# Altium PCB Beambreak Array S - Receiver.PcbDoc
Units mm, origin at the board's own origin, x right, y up, seen from the top; angles counter-clockwise.
Board outline 12 x 64 mm, 2 copper layers (Top Layer, Bottom Layer), stack 1.57 mm thick; 38 components, 22 nets, 94 pads, 32 vias.
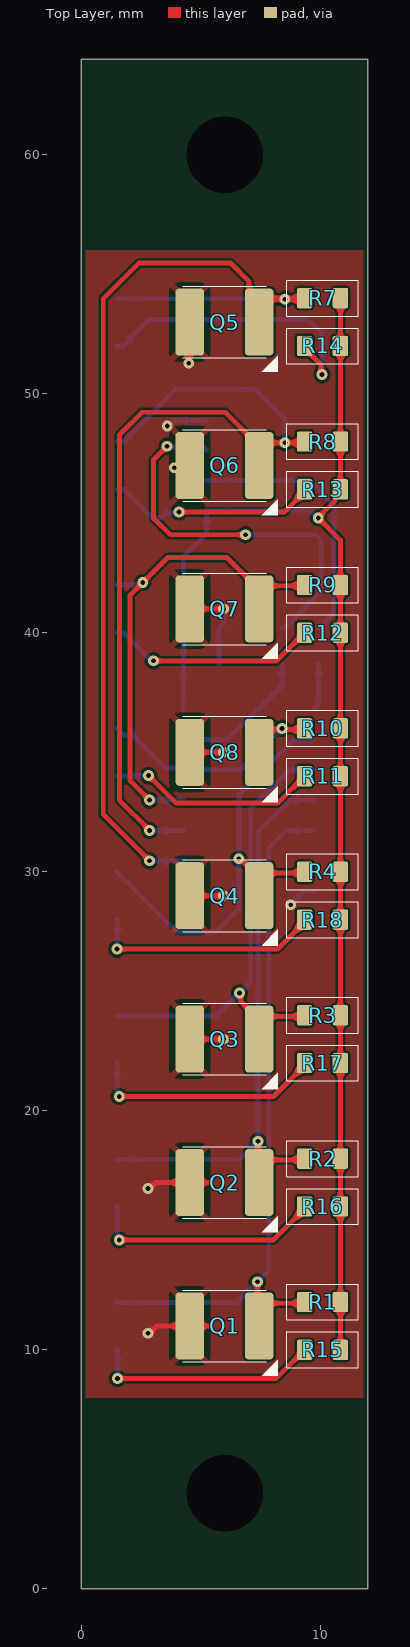
[diagram p0: Top Layer view]
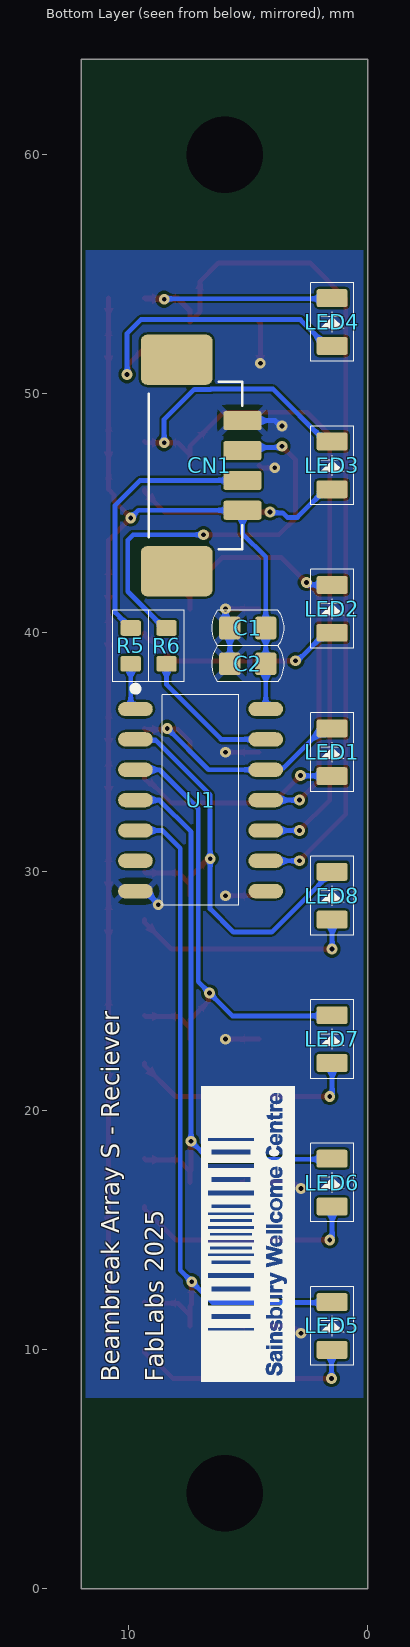
[diagram p1: Bottom Layer view, seen from below]
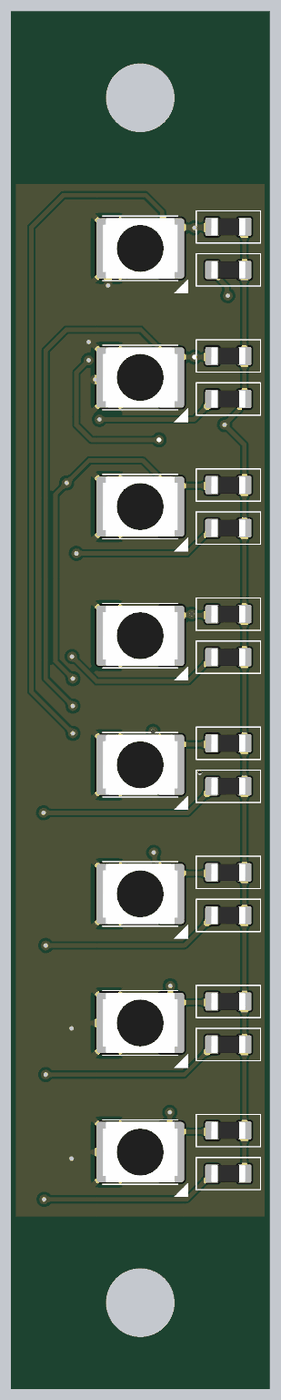
[diagram p2: 3D render of the assembled board from above, using the file's embedded part models]
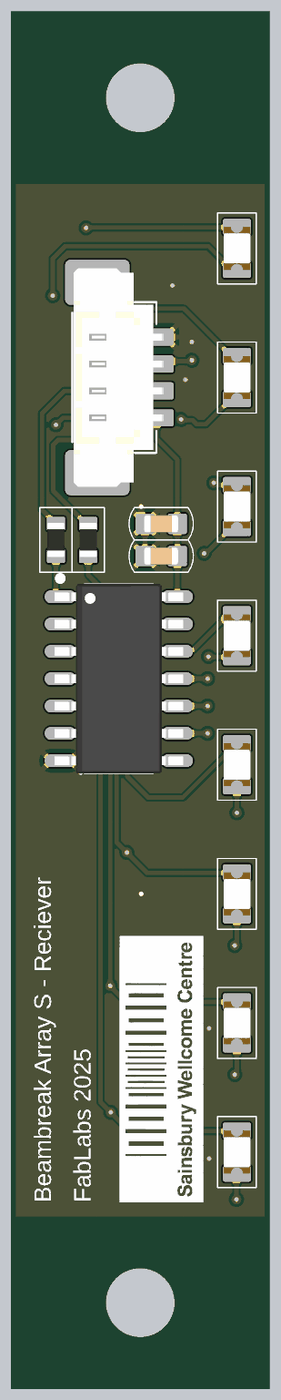
[diagram p3: 3D render of the assembled board from below, using the file's embedded part models]

## Layer stack, top to bottom
Top Solder: solder mask 0.0127, Solder Resist, Dk 3.8
Top Layer: signal copper 0.035
Dielectric: core 1.5, FR-4, Dk 4.5
Bottom Layer: signal copper 0.035
Bottom Solder: solder mask 0.0127, Solder Resist, Dk 3.8

## Board outline
0,0 12,0 12,64 0,64

## Design rules (kind name [scope] priority, off if disabled: settings)
BoardOutlineClearance [(OnLayer('Bottom Overlay') OR OnLayer('Top Overlay'))] p1: gap=0 ignorepadtopadclearanceinfootprint=FALSE
BoardOutlineClearance BoardOutlineClearance_1 [All] p2: gap=0.2 ignorepadtopadclearanceinfootprint=FALSE
Clearance [All] p1: gap=0.089 ignorepadtopadclearanceinfootprint=FALSE except(0.127: Arc-Via Track-Via SMDPad-Via THPad-Via Via-Via Via-Fill Via-Poly Via-Region Via-Text; 0.203: Arc-Hole Track-Hole Via-Hole Fill-Hole Poly-Hole Region-Hole Text-Hole)
ComponentClearance [All] p1: gap=0.089 collisioncheckmode=3 verticalgap=0.089 showdistances=TRUE
DiffPairsRouting JLCPCB_6L_90Ohm [InDifferentialPairClass('USB')] p1: maxlimit=0.127 minlimit=0.127 mostfreqgap=0.127 toplayer_minwidth=0.172 toplayer_maxwidth=0.172 toplayer_prefwidth=0.172 bottomlayer_minwidth=0.172 bottomlayer_maxwidth=0.172 bottomlayer_prefwidth=0.172 maxuncoupledlength=12.7
DiffPairsRouting JLCPCB_6L_120Ohm [InDifferentialPairClass('RS485')] p2: maxlimit=0.305 minlimit=0.127 mostfreqgap=0.305 toplayer_minwidth=0.16 toplayer_maxwidth=0.16 toplayer_prefwidth=0.16 bottomlayer_minwidth=0.16 bottomlayer_maxwidth=0.16 bottomlayer_prefwidth=0.16 maxuncoupledlength=12.7
Height [All] p1: minheight=0 maxheight=1816.048 prefheight=12.7
HoleSize [All] p1: absolutevalues=TRUE maxlimit=6.3 minlimit=0.2 maxpercent=80.000 minpercent=20.000
HoleToHoleClearance [All] p1: gap=0.25 allowstackedmicrovias=FALSE
MinimumAnnularRing [All] p1: minimumring=0.076
MinimumSolderMaskSliver [All] p1: minsoldermaskwidth=0
PlaneClearance [All] p1: clearance=0.089
PlaneConnect PlaneConnectPowerPads [InPadClass('PowerPads')] p1: planeconnectstyle=Direct reliefexpansion=0.508 reliefentries=4 reliefconductorwidth=0.254 reliefairgap=0.254
PlaneConnect [All] p2: pad.planeconnectstyle=Relief pad.reliefexpansion=0.3 pad.reliefentries=4 pad.reliefconductorwidth=0.089 pad.reliefairgap=0.089 via.planeconnectstyle=Direct via.reliefexpansion=0.3 via.reliefentries=4 via.reliefconductorwidth=0.127 via.reliefairgap=0.127
PolygonConnect PolygonConnectPowerPads [(InNet('GND') OR InNet('3V3') OR InNet('3V3A'))] p1: thpad.connectstyle=Relief thpad.reliefconductorwidth=0.254 thpad.reliefentries=4 thpad.polygonreliefangle="45 Angle" thpad.airgapwidth=0.254 smdpad.connectstyle=Relief smdpad.reliefconductorwidth=0.254 smdpad.reliefentries=4 smdpad.polygonreliefangle="45 Angle" smdpad.airgapwidth=0.254 via.connectstyle=Direct via.reliefconductorwidth=0.254 via.reliefentries=4 via.polygonreliefangle="45 Angle" via.airgapwidth=0.254
PolygonConnect [All] p2: connectstyle=Direct reliefconductorwidth=0.089 reliefentries=4 polygonreliefangle="90 Angle" airgapwidth=0.089
RoutingVias [All] p1: holewidth=0.2 width=0.45 viastyle="Through Hole" minholewidth=0.2 minwidth=0.45 maxholewidth=6.3 maxwidth=6.55
SilkToSilkClearance [All] p1: silktosilkclearance=0
SilkToSolderMaskClearance [IsPad] p1 off: minsilkscreentomaskgap=0.089 clearancetoexposedcopper=TRUE
SolderMaskExpansion [All] p1: expansion=0.075 istentingtop=FALSE
SupplyNets "Schematic Supply Nets_1" [InNet('VCC')] p1: voltage=0.000
SupplyNets "Schematic Supply Nets_4" [InNet('GND')] p2: voltage=0.000
Width [All] p1: maxlimit=1816.048 minlimit=0.089 preferedwidth=0.089
20 further rules are at their usual default settings.

## Components (designator, comment, footprint, x,y, rotation, side; value= is the part's Value field where it differs from the comment)
C1 "C0603-1uF-50V" CAP_CHIP_0603 5.025,40.2 r0 bottom value=1µF
C2 "C0603-100nF-50V" CAP_CHIP_0603 5.025,38.7 r180 bottom value=100nF
CN1 "IO" MOLEX_1.25_4P 7,47 r270 bottom
LED1 "DBG" LED_CHIP_0805 1.5,35 r270 bottom
LED2 "DBG" LED_CHIP_0805 1.5,41 r270 bottom
LED3 "DBG" LED_CHIP_0805 1.5,47 r270 bottom
LED4 "DBG" LED_CHIP_0805 1.5,53 r270 bottom
LED5 "DBG" LED_CHIP_0805 1.5,11 r270 bottom
LED6 "DBG" LED_CHIP_0805 1.5,17 r270 bottom
LED7 "DBG" LED_CHIP_0805 1.5,23 r270 bottom
LED8 "DBG" LED_CHIP_0805 1.5,29 r270 bottom
Q1 "VEMT3700F" PT_3528_NPN 6,11 r180 top
Q2 "VEMT3700F" PT_3528_NPN 6,17 r180 top
Q3 "VEMT3700F" PT_3528_NPN 6,23 r180 top
Q4 "VEMT3700F" PT_3528_NPN 6,29 r180 top
Q5 "VEMT3700F" PT_3528_NPN 6,53 r180 top
Q6 "VEMT3700F" PT_3528_NPN 6,47 r180 top
Q7 "VEMT3700F" PT_3528_NPN 6,41 r180 top
Q8 "VEMT3700F" PT_3528_NPN 6,35 r180 top
R1 "R0603-47K" RES_CHIP_0603 10.1,12 r0 top value=47k
R2 "R0603-47K" RES_CHIP_0603 10.1,18 r0 top value=47k
R3 "R0603-47K" RES_CHIP_0603 10.1,24 r0 top value=47k
R4 "R0603-47K" RES_CHIP_0603 10.1,30 r0 top value=47k
R5 "R0603-1K" RES_CHIP_0603 9.925,39.45 r270 bottom value=1k
R6 "R0603-0R" RES_CHIP_0603 8.425,39.45 r90 bottom value=0
R7 "R0603-47K" RES_CHIP_0603 10.1,54 r0 top value=47k
R8 "R0603-47K" RES_CHIP_0603 10.1,48 r0 top value=47k
R9 "R0603-47K" RES_CHIP_0603 10.1,42 r0 top value=47k
R10 "R0603-47K" RES_CHIP_0603 10.1,36 r0 top value=47k
R11 "R0603-10K" RES_CHIP_0603 10.1,34 r0 top value=10k
R12 "R0603-10K" RES_CHIP_0603 10.1,40 r0 top value=10k
R13 "R0603-10K" RES_CHIP_0603 10.1,46 r0 top value=10k
R14 "R0603-10K" RES_CHIP_0603 10.1,52 r0 top value=10k
R15 "R0603-10K" RES_CHIP_0603 10.1,10 r0 top value=10k
R16 "R0603-10K" RES_CHIP_0603 10.1,16 r0 top value=10k
R17 "R0603-10K" RES_CHIP_0603 10.1,22 r0 top value=10k
R18 "R0603-10K" RES_CHIP_0603 10.1,28 r0 top value=10k
U1 "CD4078B" SOIC14 7,33 r270 bottom

## Footprints (in the part's own frame and the unit in brackets; to place one, negate y for a bottom-side part, rotate by r counter-clockwise, add the part's x,y. Pads: shape width x height; smd on the part's side, far side on the other; paste and mask are expansions set on the pad)
CAP_CHIP_0603 [mm]
  rrect25% 0.9x0.95 smd: 1(-0.75,0) 2(0.75,0)
  silkscreen extent -1.5,-0.75 1.5,0.75, body extent -0.8,-0.4 0.8,0.4, height 0.8
LED_CHIP_0805 [mm]
  rrect25% 0.75x1.3 smd: 1(-1,0) 2(1,0)
  silkscreen extent -1.65,-0.9 1.65,0.9, body extent -1,-0.62 1,0.63, height 1
MOLEX_1.25_4P [mm]
  rrect25% 0.8x1.6 smd: 1(-1.875,1.75) 2(-0.625,1.75) 3(0.625,1.75) 4(1.875,1.75)
  rrect25% 2.1x3 smd: S1(-4.425,-1) S2(4.425,-1)
  silkscreen extent -3.5,-2.16 3.5,1.75, body extent -5.07,-2.1 5.07,2.1, height 4.7
PT_3528_NPN [mm] "3528 NPN Phototransistor"
  rrect25% 1.2x2.8 smd: 1(-1.45,0) 2(1.45,0)
  silkscreen extent -2.24,-1.5 1.75,2.09, body extent -1.75,-1.4 1.75,1.4, height 1.85
RES_CHIP_0603 [mm]
  rrect25% 0.65x0.85 smd: 1(-0.75,0) 2(0.75,0)
  silkscreen extent -1.5,-0.75 1.5,0.75, body extent -0.8,-0.4 0.8,0.4, height 0.45
SOIC14 [mm] "SOIC, 14-Leads, Body 8.65x3.90mm, Pitch 1.27mm, IPC Medium Density"
  oval 0.6x1.45 smd: 1(-3.81,-2.725) 2(-2.54,-2.725) 3(-1.27,-2.725) 4(0,-2.725) 5(1.27,-2.725) 6(2.54,-2.725) 7(3.81,-2.725) 8(3.81,2.725) 9(2.54,2.725) 10(1.27,2.725) 11(0,2.725) 12(-1.27,2.725) 13(-2.54,2.725) 14(-3.81,2.725)
  silkscreen extent -4.78,-2.85 4.4,1.6, body extent -4.4,-3 4.4,3, height 1.75

## Part data
C1: library part CMP-611-0033-11, "0603 Multilayer Ceramic Capacitors MLCC", Capacitor Type=Ceramic, Case/Package=0603, Dielectric=X5R, LCSC Part N.=C15849, PartNumber=CL10A105KB8NNNC, Tolerance=10%, Voltage Rating=50V, Mount=SMD, Pick&PlaceFootprint=C0603, RoHS=Yes
C2: library part CMP-611-0027-24, "0603 Multilayer Ceramic Capacitors MLCC", Capacitor Type=Ceramic, Case/Package=0603, Dielectric=X7R, LCSC Part N.=C14663, PartNumber=CC0603KRX7R9BB104, Tolerance=10%, Voltage Rating=50V, Mount=SMD, Pick&PlaceFootprint=C0603, RoHS=Yes
CN1: library part CMP-370-0030-7, "Conn Shrouded Header (3 Sides) HDR 4 POS 1.25mm Solder ST Top Entry SMD PicoBlade™ T/R", Current Rating=1A, LCSC Part N.=C17617036, PartNumber=53398-0471, Gender=Male, Mounting Technology="Surface Mount", Number of Positions=4, Number of Rows=1, Orientation=Vertical, Pitch=1.25mm
LED1 LED2 LED3 LED4 LED5 LED6 LED7 LED8: library part CMP-520-0019-2, "Red 0805 Light Emitting Diodes (LED) ROHS", Colour=Red, Forward Current=25mA, Forward Voltage=2.1V, LCSC Part N.=C84256, PartNumber=NCD0805R1, Mount="Surface Mount", Pick&PlaceFootprint=LED0805, Wavelength=620nm
Q1 Q2 Q3 Q4 Q5 Q6 Q7 Q8: library part CMP-540-0001-1, "No Phototransistor IR Chip Silicon 940nm 2-Pin PLCC T/R", Dark Current=200nA, LCSC Part N.=C5334342, Max Collector Current=50mA, PartNumber=VEMT3700F-GS08, Orientation="Top View", Polarity=NPN, Rise Time=6000ns, Wavelength=940nm
R1 R2 R3 R4 R7 R8 R9 R10: library part CMP-633-0052-25, "100mW Thick Film Resistors 75V ±100ppm/℃ ±1% 0603 Chip Resistor", Case/Package=0603, LCSC Part N.=C25819, Number of Resistors=1, PartNumber=0603WAF4702T5E, Power Rating=100mW, Tolerance=1%, Voltage Rating=75V, Mount="Surface Mount", Pick&PlaceFootprint=R0603
R5: library part CMP-633-0013-26, "100mW Thick Film Resistors 75V ±100ppm/℃ ±1% 0603 Chip Resistor", Case/Package=0603, LCSC Part N.=C21190, Number of Resistors=1, PartNumber=0603WAF1001T5E, Power Rating=100mW, Tolerance=1%, Voltage Rating=75V, Mount="Surface Mount", Pick&PlaceFootprint=R0603
R6: library part CMP-633-0049-25, "100mW Thick Film Resistors 75V ±100ppm/℃ ±1% 0603 Chip Resistor", Case/Package=0603, LCSC Part N.=DNP, Number of Resistors=1, PartNumber=0603WAF0000T5E, Power Rating=100mW, Tolerance=1%, Voltage Rating=75V, Mount="Surface Mount", Pick&PlaceFootprint=R0603
R11 R12 R13 R14 R15 R16 R17 R18: library part CMP-633-0002-26, "100mW Thick Film Resistors 75V ±100ppm/℃ ±1% 0603 Chip Resistor", Case/Package=0603, LCSC Part N.=C25804, Number of Resistors=1, PartNumber=0603WAF1002T5E, Power Rating=100mW, Tolerance=1%, Voltage Rating=75V, Mount="Surface Mount", Pick&PlaceFootprint=R0603
U1: library part CMP-950-0028-2, "IC GATE NOR/OR 8INPUT 14SOIC NOR/OR Gate Configurable 1 Circuit 8 Input 14-SOIC", LCSC Part N.=C84464, Max Supply Voltage=18V, Min Supply Voltage=3V, PartNumber=CD4078BM96, Channels=8, Logic Function="NOR, OR", Number of Bits=1, Number Of Circuits=1, Pick&PlaceFootprint=SOIC14, Propagation Delay=110ns

## Free pads (board coordinates)
  round 0 hole 3.2 unplated: 1(6,4) 1(6,60)

## Via types
v1: diameter 0.45, hole 0.2, Top Layer to Bottom Layer, tented both sides, 32 vias

## Nets (pads, with @x,y where several pads share a name; then routed paths per layer and width w, separated by ;. In a path a pad name is that pad's centre, name@x,y a point inside that pad or via, vN(x,y) a via of type N, cw(c..) or ccw(c..) an arc to the next point about the centre after c; other vN are vias at no path point)
GND: C1.2 C2.1 CN1.1 Q1.2 Q2.2 Q3.2 Q4.2 Q5.2 Q6.2 Q7.2 Q8.2 U1.7 | length 17.2
  Top Layer w0.203: v1(2.8,10.7) 2.867,10.7 3.167,11 Q1.2 ; v1(2.8,16.75) 2.867,16.75 3.117,17 Q2.2 ; v1(3.9,46.9) 4.45,46.9 Q6.2 ; v1(4.5,51.275) 4.5,52.95 Q5.2 ; Q3.2 v1(5.96,23) v1@5.975,23.015 ; Q4.2 v1(5.96,29) v1@5.975,29.015 ; Q8.2 v1(5.96,35) v1@5.975,35.015 ; Q7.2 v1(5.96,41) v1@5.975,41.015
  Bottom Layer w0.203: v1(3.6,48.65) 3.667,48.65 3.892,48.875 CN1.1 ; C2.1 C1.2 5.96,40.385 v1(5.96,41) ; v1(8.774,28.622) 8.774,28.643 9.321,29.19 U1.7
INA: LED8.1 Q4.1 R4.1 U1.2 | length 19.5
  Top Layer w0.203: v1(6.6,30.55) 6.647,30.503 6.721,30.503 7.45,29.774 Q4.1@7.45,29.475 ; Q4.1 Q4.1@7.45,29.475 ; R4.1 9.3,29.95 7.925,29.95 Q4.1@7.45,29.475
  Bottom Layer w0.203: LED8.1 4.025,27.475 5.625,27.475 6.6,28.45 v1(6.6,30.55) 6.6,33.225 8.883,35.508 9.693,35.508 U1.2
INB: LED7.1 Q3.1 R3.1 U1.3 | length 21.1
  Top Layer w0.203: v1(6.625,24.925) 6.672,24.878 6.672,24.578 7.45,23.8 Q3.1@7.45,23.475 ; Q3.1 Q3.1@7.45,23.475 ; R3.1 9.3,23.95 7.925,23.95 Q3.1@7.45,23.475
  Bottom Layer w0.203: LED7.1@1.525,23.975 5.675,23.975 v1(6.625,24.925) 7.1,25.4 7.1,32.65 8.72,34.27 U1.3
INC: LED6.1 Q2.1 R2.1 U1.4 | length 25.9
  Top Layer w0.203: v1(7.4,18.725) 7.4,17.525 Q2.1@7.45,17.475 ; Q2.1 Q2.1@7.45,17.475 ; R2.1 9.3,17.95 7.925,17.95 Q2.1@7.45,17.475
  Bottom Layer w0.203: LED6.1@1.525,17.975 6.65,17.975 v1(7.4,18.725) 7.4,31.675 8.725,33 U1.4
IND: LED5.1 Q1.1 R1.1 U1.5 | length 30.8
  Top Layer w0.203: v1(7.375,12.85) 7.375,11.901 7.45,11.826 Q1.1@7.45,11.455 ; Q1.1 Q1.1@7.45,11.455 ; R1.1 9.3,11.95 7.945,11.95 Q1.1@7.45,11.455
  Bottom Layer w0.203: LED5.1 1.525,11.975 6.5,11.975 v1(7.375,12.85) 7.854,13.329 7.854,30.987 8.597,31.73 U1.5
INE: LED4.1 Q5.1 R7.1 U1.9 | length 46.4
  Top Layer w0.203: v1(2.865,30.46) 0.925,32.4 0.925,53.975 2.425,55.475 6.25,55.475 7.02,54.705 7.02,53.43 Q5.1 Q5.1@7.45,53.455 ; Q5.1@7.45,53.455 7.45,53.505 7.945,54 R7.1 9.3,53.95 v1(8.525,53.95) 7.945,53.95 Q5.1@7.45,53.455
  Bottom Layer w0.203: LED4.1@1.525,53.975 v1@8.5,53.975 ; v1@2.85,30.475 v1(2.865,30.46) U1.9
INF: LED3.1 Q6.1 R8.1 U1.10 | length 37.7
  Top Layer w0.203: v1(2.865,31.73) 1.6,32.995 1.6,48.275 2.55,49.225 6.025,49.225 7.45,47.8 Q6.1@7.45,47.455 ; Q6.1 Q6.1@7.45,47.455 ; R8.1 9.3,47.95 v1(8.525,47.95) 7.945,47.95 Q6.1@7.45,47.455
  Bottom Layer w0.203: LED3.1 1.775,48 3.975,50.2 6.559,50.2 6.575,50.184 7.266,50.184 8.525,48.925 v1(8.525,47.95) ; v1@2.85,31.745 v1(2.865,31.73) U1.10
ING: LED2.1 Q7.1 R9.1 U1.11 | length 21
  Top Layer w0.203: v1(2.865,33) 2.05,33.815 2.05,41.575 3.625,43.15 6.1,43.15 7.45,41.8 Q7.1@7.45,41.473 ; Q7.1 Q7.1@7.45,41.473 ; R9.1 9.318,41.968 7.945,41.968 Q7.1@7.45,41.473
  Bottom Layer w0.203: LED2.1 2.408,42 2.508,42.1 v1(2.575,42.1) ; v1(2.865,33) U1.11
INH: LED1.1 Q8.1 R10.1 U1.12 | length 10.9
  Top Layer w0.203: Q8.1 7.45,35.455 7.945,35.95 9.3,35.95 R10.1
  Bottom Layer w0.203: LED1.1 1.773,35.727 2.148,35.727 3.529,34.346 4.199,34.346 U1.12 6.67,34.27 v1(8.4,36)
NetCN1_2: CN1.2 R6.2 | length 16.8
  Top Layer w0.203: v1(3.598,47.8) 3.025,47.227 3.025,44.8 3.725,44.1 v1(6.875,44.1)
  Bottom Layer w0.203: v1(3.598,47.8) 3.645,47.753 5.122,47.753 CN1.2 ; v1(6.875,44.1) 9.825,44.1 10.05,43.875 10.05,41.725 8.525,40.2 R6.2
NetCN1_3: CN1.3 R5.1 | length 11.2
  Bottom Layer w0.203: CN1.3 9.531,46.375 10.575,45.331 10.575,40.85 10.248,40.523 10.248,40.423 10.025,40.2 R5.1
NetLED1_2: LED1.2 R11.1 | length 8.9
  Top Layer w0.203: v1(2.825,34.025) 3.975,32.875 8.225,32.875 9.027,33.677 9.127,33.677 9.35,33.9 R11.1
  Bottom Layer w0.203: LED1.2 1.513,34.012 2.812,34.012 v1(2.825,34.025)
NetLED2_2: LED2.2 R12.1 | length 8.9
  Top Layer w0.203: v1(3.025,38.825) 8.175,38.825 9.027,39.677 9.127,39.677 9.35,39.9 R12.1
  Bottom Layer w0.203: LED2.2 1.775,40 2.903,38.872 2.978,38.872 v1(3.025,38.825)
NetLED3_2: LED3.2 R13.1 | length 8.9
  Top Layer w0.203: v1(4.098,45.05) 8.5,45.05 9.35,45.9 R13.1
  Bottom Layer w0.203: LED3.2 1.775,46 2.95,44.825 3.378,44.825 3.568,45.015 4.063,45.015 v1(4.098,45.05)
NetLED4_2: LED4.2 R14.1 | length 12.5
  Top Layer w0.203: R14.1 9.35,51.9 10.028,51.222 10.028,50.847 v1(10.075,50.8)
  Bottom Layer w0.203: LED4.2 1.775,52 2.048,52.273 2.048,52.324 2.824,53.1 9.5,53.1 10.075,52.525 v1(10.075,50.8)
NetLED5_2: LED5.2 R15.1 | length 9.6
  Top Layer w0.203: v1(1.525,8.8) 8.15,8.8 9.027,9.677 9.127,9.677 9.35,9.9 R15.1
  Bottom Layer w0.203: LED5.2 1.525,9.975 v1(1.525,8.8)
NetLED6_2: LED6.2 R16.1 | length 9.8
  Top Layer w0.203: v1(1.6,14.6) 8.05,14.6 9.35,15.9 R16.1
  Bottom Layer w0.203: LED6.2 1.5,14.767 1.6,14.667 v1(1.6,14.6)
NetLED7_2: LED7.2 R17.1 | length 9.6
  Top Layer w0.203: v1(1.6,20.6) 8.05,20.6 9.35,21.9 R17.1
  Bottom Layer w0.203: v1@1.5,20.767 LED7.2
NetLED8_2: LED8.2 R18.1 | length 9.7
  Top Layer w0.203: v1(1.5,26.767) 8.217,26.767 9.35,27.9 R18.1
  Bottom Layer w0.203: v1(1.5,26.767) LED8.2
NOR_OUT: R6.1 U1.13 | length 6
  Bottom Layer w0.203: U1.13 6.14,35.54 8.425,37.825 R6.1
OR_OUT: R5.2 U1.1 | length 2
  Bottom Layer w0.203: U1.1 9.742,36.81 9.925,36.993 R5.2
VCC: C1.1 C2.2 CN1.4 R1.2 R2.2 R3.2 R4.2 R7.2 R8.2 R9.2 R10.2 R11.2 R12.2 R13.2 R14.2 R15.2 R16.2 R17.2 R18.2 U1.14 | length 57.8
  Top Layer w0.203: v1(9.925,44.8) 10.85,43.875 R9.2 R12.2 R10.2 R11.2 R4.2 R18.2 R3.2 R17.2 R2.2 R16.2 R1.2 R15.2 ; v1@10.033,44.933 10.627,45.527 10.627,45.777 R13.2 R8.2 R14.2 R7.2
  Bottom Layer w0.203: U1.14 C1.1@4.275,39.9 ; C1.1 4.275,43.175 5.25,44.15 CN1.4 9.6,45.125 v1(9.925,44.8)
pads on no net: CN1.S1 CN1.S2 U1.6 U1.8

## Polygon pours and split planes (outlines as drawn)
GND on Top Layer "Top Layer-GND" (solid, remove dead copper, pour order 0): 0,8 0,56 12,56 12,8
GND on Bottom Layer "Top Layer-GND" (solid, remove dead copper, pour order 1): 0,8 0,56 12,56 12,8

## Silkscreen, mask and mechanical layers (free items; w line width, h text height)
Bottom Overlay:
  drawing of 8 lines, arcs and shapes, not listed
  text "FabLabs 2025" at 8.309,8.661 h1.27 r270
  text "Beambreak Array S - Reciever" at 10.159,8.661 h1.27 r270
Board Shape:
  the board outline again, w0.05